# Altium PCB VLC_TX.PcbDoc
Units mil, origin at the board's own origin, x right, y up, seen from the top; angles counter-clockwise.
Board outline 1940 x 3020 mil, 2 copper layers (Top Layer, Bottom Layer); 18 components, 54 nets, 150 pads, 0 vias.
Unrouted connection lines stored in the file: 90.
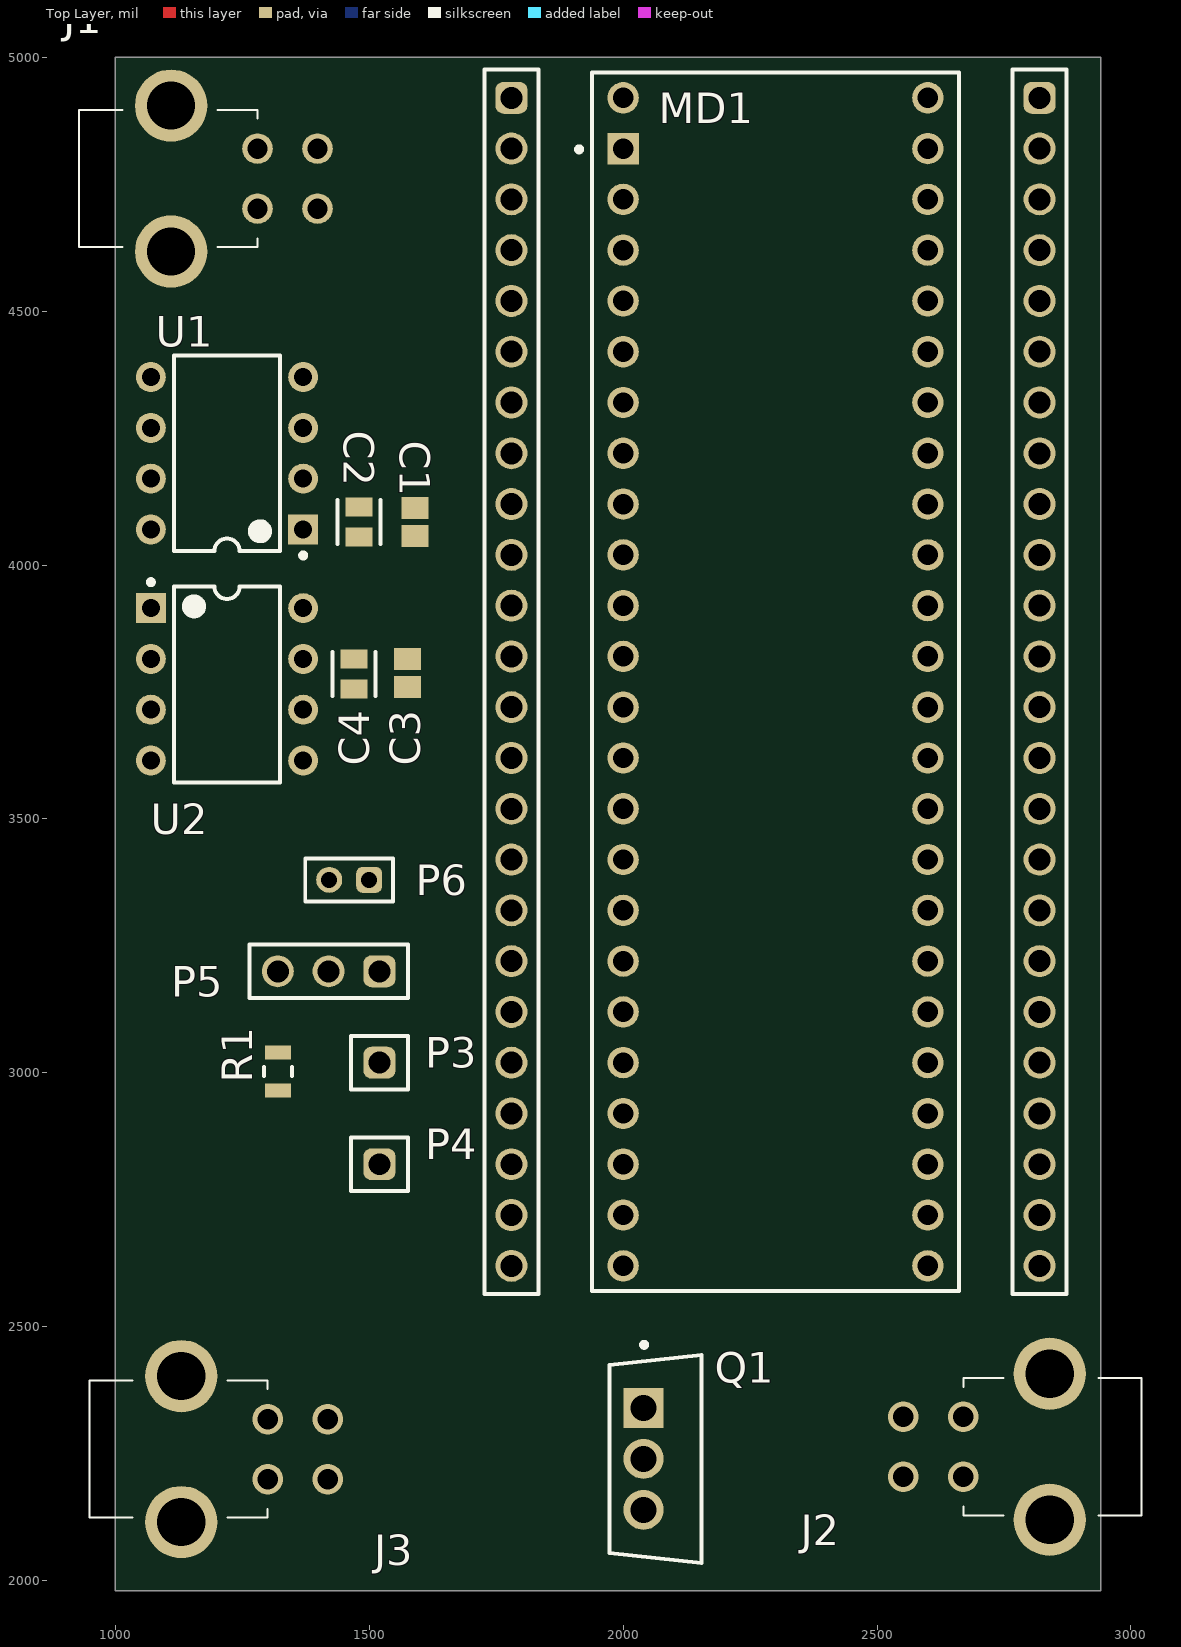
[diagram p0: Top Layer view]
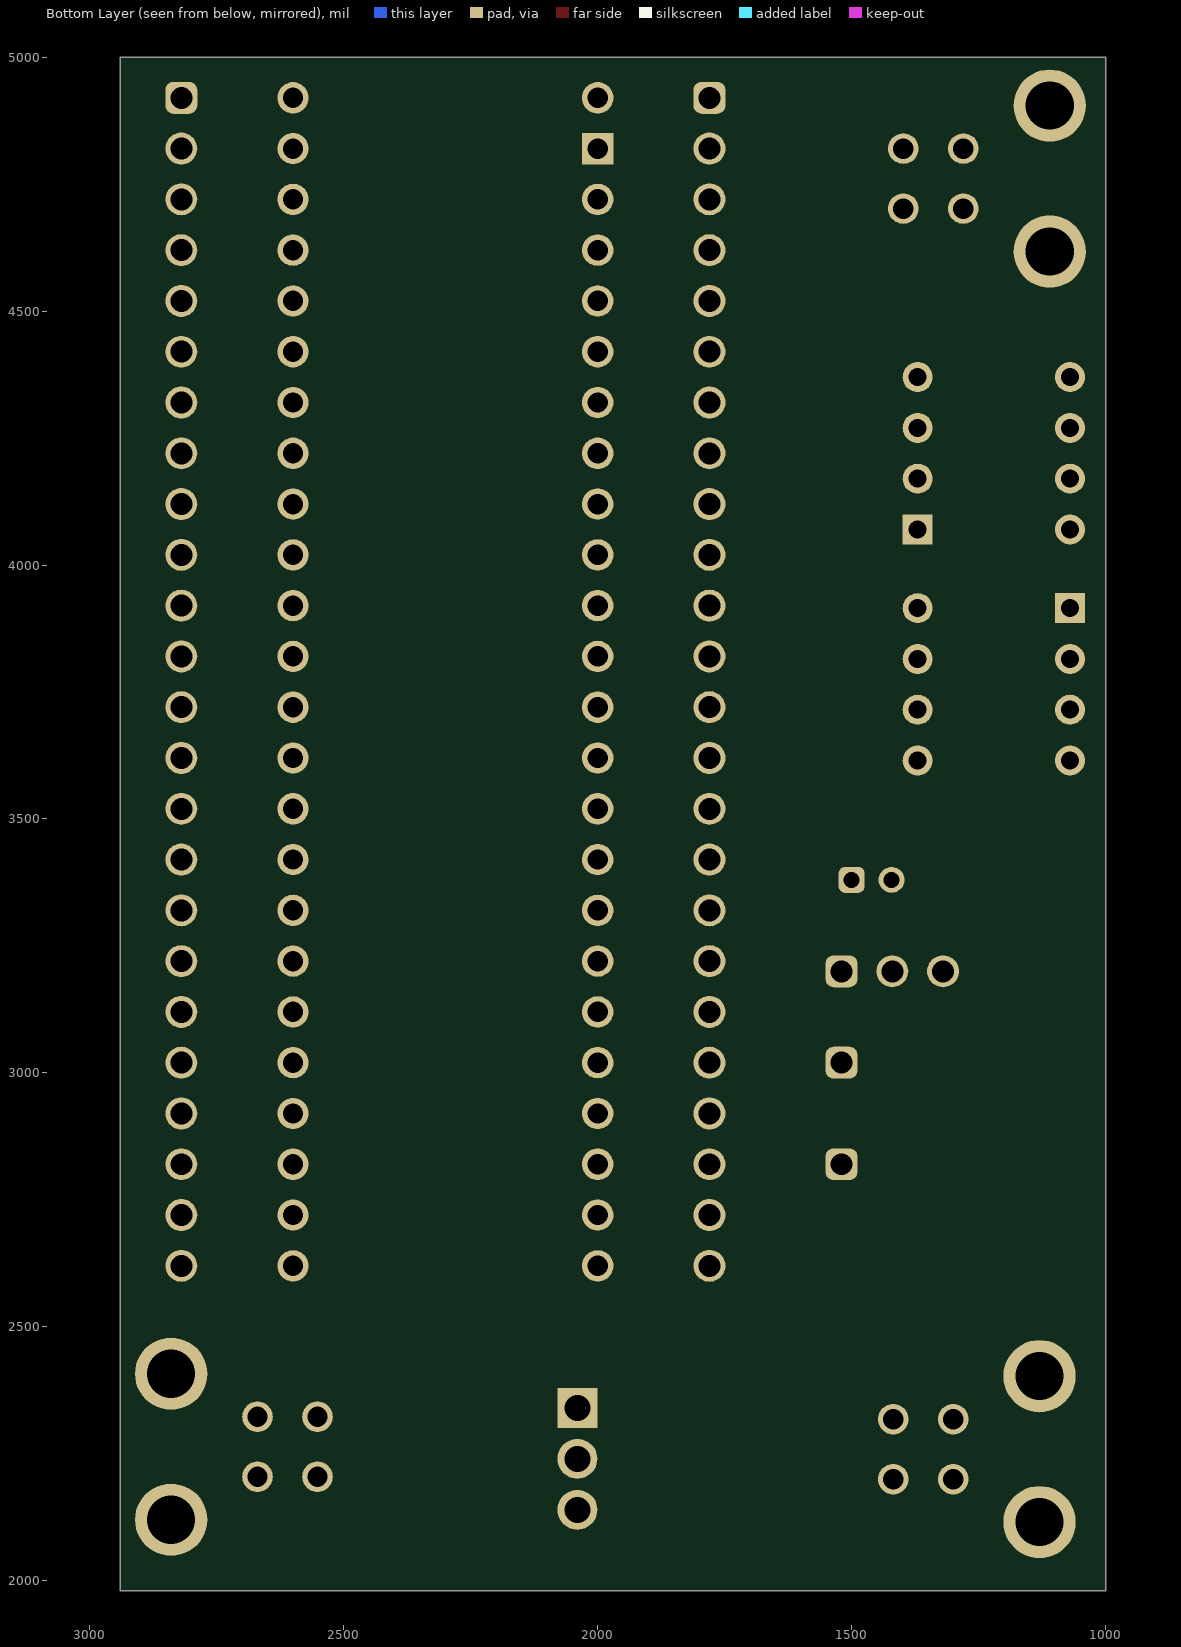
[diagram p1: Bottom Layer view, seen from below]

## Layer stack, top to bottom
Top Solder: solder mask 0.4, Solder Resist, Dk 3.5
Top Layer: signal copper 1.4
Dielectric 1: dielectric 12.6, FR-4, Dk 4.8
Bottom Layer: signal copper 1.4
Bottom Solder: solder mask 0.4, Solder Resist, Dk 3.5

## Board outline
1000,1980 2940,1980 2940,5000 1000,5000

## Design rules (kind name [scope] priority, off if disabled: settings)
Clearance [All] p1: gap=10 ignorepadtopadclearanceinfootprint=FALSE
PolygonConnect [All] p1: connectstyle=Relief reliefconductorwidth=10 reliefentries=4 polygonreliefangle="90 Angle" airgapwidth=10
RoutingVias [All] p1: holewidth=28 width=50 viastyle="Through Hole" minholewidth=28 minwidth=50 maxholewidth=28 maxwidth=50
SolderMaskExpansion [All] p1: expansion=4 istentingtop=FALSE
Width [All] p1: maxlimit=10 minlimit=10 preferedwidth=10
30 further rules are at their usual default settings.

## Classes and differential pairs
component class VLC_TX: J1 J2 J3
component class U_Transconductance: C1 C2 C3 C4 P3 P4 P5 P6 Q1 R1 U1 U2
component class U_Teensy: MD1

## Components (designator, comment, footprint, x,y, rotation, side; value= is the part's Value field where it differs from the comment)
C1 "1uF" CAPC2013X145X50LL20T25 1590,4085 r270 top
C2 "100nF" FP-C0805C-DN-MFG 1480,4085 r90 top value="0.10 μF"
C3 "1uF" CAPC2013X145X50LL20T25 1575,3787.56 r90 top
C4 "100nF" FP-C0805C-DN-MFG 1470,3785 r270 top value="0.10 μF"
J1 "3-794677-4" 37946774 1280,4820 r270 top
J2 "3-794677-4" 37946774 2669.92,2204.65 r90 top
J3 "3-794677-4" 37946774 1300,2318.11 r270 top
MD1 "teensy 4.1" FP-DEV-16996-MFG 2300,3770 r270 top
P1 "61302411121" 61302411121 1780,3770 r270 top
P2 "61302411121" 61302411121 2820,3770 r270 top
P3 "61300111121" 61300111121 1520,3020 r0 top
P4 "61300111121" 61300111121 1520,2820 r0 top
P5 "61300311121" 61300311121 1420,3200 r180 top
P6 "62000211121" 62000211121 1460.63,3380 r180 top
Q1 "TIP31C" FP-TO-220-P0A0015988-MFG 2063.92,2240 r0 top
R1 "100" FP-TNPW0805-e3-MFG 1320,3002.6 r270 top
U1 "MCP4811-E/P" PDIP300-P8 1220,4220 r180 top
U2 "MCP6021-E/P" PDIP300-P8 1220,3765 r0 top

## Footprints (in the part's own frame and the unit in brackets; to place one, negate y for a bottom-side part, rotate by r counter-clockwise, add the part's x,y. Pads: shape width x height; smd on the part's side, far side on the other; paste and mask are expansions set on the pad)
37946774 [mm]
  round 1.53 hole 1.02: 1(0,0) 2(0,3) 3(3,0) 4(3,3)
  round 3.615 hole 2.41: MH1(-2.15,-4.32) MH2(5.15,-4.32)
  silkscreen extent -1.93,-8.92 4.93,0, body extent -3.5,-8.99 6.5,3.25, height 8.59
61300111121 [mm] "Pin Header, pitch 2.54 mm, THT, Vertical, single row, 1p"
  rrect50% 1.6x1.6 hole 1.1: 1(0,0)
  silkscreen extent -1.42,-1.35 1.42,1.35, body extent -1.27,-1.27 1.27,1.27, height 8.57
61300311121 [mm] "Pin Header, pitch 2.54 mm, THT, Vertical, single row, 3p"
  rrect50% 1.6x1.6 hole 1.1: 1(-2.54,0)
  round 1.6 hole 1.1: 2(0,0) 3(2.54,0)
  silkscreen extent -3.96,-1.35 3.96,1.35, body extent -3.81,-1.27 3.81,1.27, height 8.57
61302411121 [mm] "Pin Header, pitch 2.54 mm, THT, Vertical, single row, 24p"
  rrect50% 1.6x1.6 hole 1.1: 1(-29.21,0)
  round 1.6 hole 1.1: 2(-26.67,0) 3(-24.13,0) 4(-21.59,0) 5(-19.05,0) 6(-16.51,0) 7(-13.97,0) 8(-11.43,0) 9(-8.89,0) 10(-6.35,0) 11(-3.81,0) 12(-1.27,0) 13(1.27,0) 14(3.81,0) 15(6.35,0) 16(8.89,0) 17(11.43,0) 18(13.97,0) 19(16.51,0) 20(19.05,0) 21(21.59,0) 22(24.13,0) 23(26.67,0) 24(29.21,0)
  silkscreen extent -30.63,-1.35 30.63,1.35, body extent -30.48,-1.27 30.48,1.27, height 8.57
62000211121 [mm] "Pin Header, pitch 2.00 mm, THT, Vertical, single row, 2p"
  rrect50% 1.3x1.3 hole 0.8: 1(-1,0)
  round 1.3 hole 0.8: 2(1,0)
  silkscreen extent -2.2,-1.07 2.2,1.07, body extent -2,-1 2,1, height 6.05
CAPC2013X145X50LL20T25 [mm] "Chip Capacitor, 2-Leads, Body 2.00x1.25mm, IPC High Density"
  rect 1.1x1.35 smd: 1(-0.7,0) 2(0.7,0)
  body extent -1.1,-0.72 1.1,0.72, height 1.45
FP-C0805C-DN-MFG [mm]
  rect 0.95x1.35 smd paste+0 mask+0: 1(-0.75,0) 2(0.75,0)
  silkscreen extent -1.1,-1.07 1.1,1.07, body extent -1.4,-0.85 1.4,0.85, height 0.25
FP-DEV-16996-MFG [mm]
  rect 1.57x1.57 hole 1.02 paste-2539.97 mask+0: 0(-26.67,-7.62)
  round 1.57 hole 1.02 paste-2539.97 mask+0: 1(-24.13,-7.62) 2(-21.59,-7.62) 3(-19.05,-7.62) 4(-16.51,-7.62) 5(-13.97,-7.62) 6(-11.43,-7.62) 7(-8.89,-7.62) 8(-6.35,-7.62) 9(-3.81,-7.62) 10(-1.27,-7.62) 11(1.27,-7.62) 12(3.81,-7.62) 13(3.81,7.62) 14(1.27,7.62) 15(-1.27,7.62) 16(-3.81,7.62) 17(-6.35,7.62) 18(-8.89,7.62) 19(-11.43,7.62) 20(-13.97,7.62) 21(-16.51,7.62) 22(-19.05,7.62) 23(-21.59,7.62) 24(8.89,-7.62) 25(11.43,-7.62) 26(13.97,-7.62) 27(16.51,-7.62) 28(19.05,-7.62) 29(21.59,-7.62) 30(24.13,-7.62) 31(26.67,-7.62) 32(29.21,-7.62) 33(29.21,7.62) 34(26.67,7.62) 35(24.13,7.62) 36(21.59,7.62) 37(19.05,7.62) 38(16.51,7.62) 39(13.97,7.62) 40(11.43,7.62) 41(8.89,7.62) 42(-29.21,7.62) 43(-26.67,7.62) 44(-24.13,7.62) 45(6.35,7.62) 46(-29.21,-7.62) 47(6.35,-7.62)
  silkscreen extent -30.48,-9.94 30.48,9.19, body extent -30.58,-9.29 30.58,9.29, height 0.25
FP-TNPW0805-e3-MFG [mm]
  rect 0.7x1.3 smd paste+0 mask+0: 1(-0.95,0) 2(0.95,0)
  silkscreen extent -0.23,-0.7 0.23,0.7, body extent -1.4,-0.8 1.4,0.8, height 0.25
FP-TO-220-P0A0015988-MFG [mm]
  rect 2x2 hole 1.3 paste-2539.97 mask+0: 1(-0.607,2.55)
  round 2 hole 1.3 paste-2539.97 mask+0: 2(-0.607,0) 3(-0.607,-2.55)
  silkscreen extent -2.3,-5.2 2.3,5.82, body extent -2.4,-5.3 2.4,5.3, height 0.25
PDIP300-P8 [mm] "8-Pin Plastic Dual In-Line Package (PDIP)"
  rect 1.5x1.5 hole 0.9: 1(-3.81,3.81)
  round 1.5 hole 0.9: 2(-3.81,1.27) 3(-3.81,-1.27) 4(-3.81,-3.81) 5(3.81,-3.81) 6(3.81,-1.27) 7(3.81,1.27) 8(3.81,3.81)
  silkscreen extent -3.94,-4.9 2.65,5.23, body extent -3.55,-4.9 3.55,4.9, height 4.32

## Part data
C1 C3: library part CMP-1036-04746-2, Manufacturer=Kemet, Part Number=C0805C105K4PACTU
C2 C4: library part CMP-2007-00274-2, "CAP CER 0.1UF 16V X7R 0805", Capacitance="0.10 μF", Manufacturer=KEMET, Manufacturer Part Number=C0805C104K4RACTU, Package=C0805C-DN, Temperature="-55°C to +125°C", Temperature Characteristic=X7R, Temperature Coefficient=30ppm/°C, Temperature Range High=+125°C, Temperature Range Low=-55°C, Tolerance=0.1, Voltage Rating="16 V", Automotive=No, Category=Cap, ComponentLink2Description=Datasheet, ComponentLink2URL=https://content.kemet.com/datasheets/KEM_C1003_C0G_SMD.pdf, Device Class L1="Passive Components", Device Class L2=Capacitors, Device Class L3="Ceramic Capacitors", Digikey Description="CAP CER 0.1UF 16V X7R 0805", Height=0.88mm, Ipc Land Pattern Name=CAPC200125X78, Lead Free=Yes, Material=Ceramic, Mouser Description="Multilayer Ceramic Capacitors MLCC - SMD/SMT 16volts 0.1uF X7R 10%", Octopart=https://octopart.com/c0805c104k4ractu-kemet-92155, RoHS=TRUE
J1 J2 J3: "Connector", Manufacturer_Name="TE Connectivity", Mouser Part Number=571-3-794677-4, Arrow Part Number=3-794677-4, Arrow Price/Stock=https://www.arrow.com/en/products/3-794677-4/te-connectivity?region=europe, Datasheet Link=https://www.te.com/commerce/DocumentDelivery/DDEController?Action=srchrtrv&DocNm=micro-mate-n-lok-connector-qrg&DocType=Data%20Sheet&DocLang=English&PartCntxt=3-794677-4&DocFormat=pdf, Height=8.67mm, Manufacturer_Part_Number=3-794677-4, Mouser Price/Stock=https://www.mouser.co.uk/ProductDetail/TE-Connectivity-AMP/3-794677-4?qs=6xDM53S3Z3IXPJK6%252BrOgPw%3D%3D
MD1: library part CMP-157412-000001-1, "TEENSY 4.1 (HEADERS)"
P1 P2: library part CMP-1502-01109-2, Color=Black, Contact Resistance=20mΩ, Current Rating=3A, Operating Supply Voltage=250V, Connector Type="Male Pin", Contact Material=Copper, Contact Mating Length=5.9944mm, Contact Plating=Gold, Gender=Male, Lead Pitch=2.54mm, Mount="Through Hole", NexarPartId=32855561, Number of Contacts=24, Number of Pins=24, Number of Positions=24, Number of Rows=1, Orientation=Vertical, Packaging=Bulk, Pitch=2.54mm, REACH SVHC=Unknown, RoHS=Compliant, Termination=Solder
P3 P4: library part CMP-1502-01058-2, Color=Black, Contact Resistance=20mΩ, Current Rating=3A, Operating Supply Voltage=250V, Connector Type="Male Pin", Contact Material=Copper, Contact Mating Length=5.9944mm, Contact Plating=Gold, Gender=Male, Lead Pitch=2.54mm, Mount="Through Hole", NexarPartId=32855518, Number of Contacts=1, Number of Pins=1, Number of Positions=1, Number of Rows=1, Orientation=Vertical, Packaging=Bulk, REACH SVHC=Unknown, RoHS=Compliant, Termination=Solder
P5: library part CMP-1502-01062-2, Color=Black, Contact Resistance=20mΩ, Current Rating=3A, Max Operating Temperature=105°C, Min Operating Temperature=-40°C, Operating Supply Voltage=250V, Connector Type="Male Pin", Contact Material=Copper, Contact Mating Length=5.9944mm, Contact Plating=Gold, Gender=Male, Height=8.94mm, Lead Free="Lead Free", Lead Pitch=2.54mm, Mount="Through Hole", NexarPartId=32855521, Number of Contacts=3, Number of Pins=3, Number of Positions=3, Number of Rows=1, Orientation=Vertical, Packaging=Bulk, Pitch=2.54mm, REACH SVHC=Unknown, RoHS=Compliant, Termination=Solder, Voltage Rating=250V
P6: library part CMP-1502-00956-3, Contact Resistance=20mΩ, Current Rating=2A, Max Operating Temperature=105°C, Min Operating Temperature=-40°C, Operating Supply Voltage=200V, Contact Material=Gold, Gender=Male, Height=6.35mm, Lead Pitch=2mm, NexarPartId=61924778, Number of Contacts=2, Number of Pins=2, Number of Rows=1, Orientation=Vertical, RoHS=Non-Compliant, Voltage Rating=200V
Q1: library part CMP-12195-000001-1, "TRANS NPN 100V 3A TO-220", Collector Base Voltage=100V, Collector Emitter Saturation Voltage=1.2V, Emitter Base Voltage=5V, Manufacturer=STMicroelectronics, Max Collector Current=3A, Max Junction Temp=+150°C, Package=TO-220-P0A0015988, Power Dissipation=2W, Temperature="to +150°C", Automotive=No, Category=Trans, Collector Emitter Voltage=100V, ComponentLink2Description=Datasheet, ComponentLink2URL=https://www.st.com/resource/en/datasheet/tip31c.pdf, Device Class L1="Discrete Semiconductors", Device Class L2=Transistors, Device Class L3=BJTs, Digikey Description="TRANS NPN 100V 3A TO-220", Height=19.68mm, Hfe Max=50, Hfe Min=10, Hfe Testic=3A, Hfe Testvce=4V, Lead Free=Yes, Manufacturer Part Number=TIP31C, Mouser Description="Bipolar Transistors - BJT NPN Gen Pur Power", Number Of Elements=1, Number Of Npn=1, Octopart=https://octopart.com/tip31c-stmicroelectronics-15555, RoHS=TRUE, Standoff Height=3.5mm, Temperature Range High=+150°C
R1: library part CMP-2001-04723-2, Case Code (Imperial)=0805, Case Code (Metric)=2012, Max Operating Temperature=125°C, Min Operating Temperature=-55°C, Power Rating=125mW, Resistance=100Ω, Temperature Coefficient=25ppm/°C, Tolerance=1%, Voltage Rating=150V, Voltage Rating (DC)=100V, Case/Package=0805, Composition="Thin Film", Contact Plating=Tin, Depth=1.25mm, Height=450µm, Lead Free="Lead Free", Length=2mm, Military Standard=Not, NexarPartId=42014021, Number of Pins=2, Number of Terminations=2, Packaging="Cut Tape", Radiation Hardening=No, REACH SVHC="No SVHC", RoHS=Compliant, Schedule B="8533210045, 8533210045", Termination=SMD/SMT, Weight=5.499807mg, Width=1.2mm, Working Voltage=150V
U1: library part CMP-0188-01069-1, "10-Bit DACs with Internal VREF and SPI Interface, 8-Pin PDIP, Extended Temperature", Code_JEDEC=MS-001, ComponentLink1Description="Manufacturer URL", ComponentLink1URL=http://www.microchip.com/, ComponentLink2Description=Datasheet, ComponentLink2URL=http://ww1.microchip.com/downloads/en/DeviceDoc/22244B.pdf, ComponentLink3Description="Package Specification", ComponentLink3URL=http://www.microchip.com/stellent/groups/techpub_sg/documents/packagingspec/en012702.pdf, DatasheetVersion="revB, Apr-2010", PackageDescription="8-Lead Plastic Dual In-Line (P) - 300 mil Body [PDIP]", PackageReference=PDIP300-P8, PackageVersion="revBB, Aug-2009"
U2: library part CMP-0187-00675-2, "None", Case/Package=PDIP, Input Bias Current=1pA, Input Offset Voltage (Vos)=250uV, Max Operating Temperature=125°C, Max Supply Voltage=5.5V, Min Operating Temperature=-40°C, Min Supply Voltage=2.5V, Nominal Supply Current=1mA, Output Current=22mA, Output Current per Channel=30mA, Package Quantity=60, Power Supply Rejection Ratio (PSRR)=74dB, Voltage Gain=110dB, Amplifier Type="GENERAL PURPOSE", Bandwidth=10MHz, Common Mode Rejection Ratio=70dB, Gain Bandwidth Product=10MHz, Harmonic Distortion=0.00053%, Height=0.195inch, Lead Free="Lead Free", Length=0.4inch, Mount="Through Hole", Number of Amplifiers=1, Number of Channels=1, Number of Circuits=1, Number Of Elements=1, Number of Pins=8, Operating Supply Current=1mA, Packaging=Rail/Tube, Radiation Hardening=No, REACH SVHC="No SVHC", RoHS Compliant=Yes, Slew Rate=7V/µs, Supply Current=1mA, Technology=CMOS, Unity Gain Bandwidth Product=10MHz, Width=0.28inch

## Nets (pads, with @x,y where several pads share a name; then routed paths per layer and width w, separated by ;. In a path a pad name is that pad's centre, name@x,y a point inside that pad or via, vN(x,y) a via of type N, cw(c..) or ccw(c..) an arc to the next point about the centre after c; other vN are vias at no path point)
0: MD1.0 P1.2
1: MD1.1 P1.3
2: MD1.2 P1.4
3: MD1.3 P1.5
3V3L: MD1.44 P2.3
3V3R: MD1.47 P1.15
4: MD1.4 P1.6
5: MD1.5 P1.7
5V: C1.2 C2.1 C3.2 C4.1 J1.2 J1.4 MD1.42 P2.1 U1.1 U2.7
6: MD1.6 P1.8
7: MD1.7 P1.9
8: MD1.8 P1.10
9: MD1.9 P1.11
10: MD1.10 P1.12 U1.2
11: MD1.11 P1.13
12: MD1.12 P1.14
13: MD1.13 P2.14 U1.3 U1.4
14: MD1.14 P2.13
15: MD1.15 P2.12
16: MD1.16 P2.11
17: MD1.17 P2.10
18: MD1.18 P2.9
19: MD1.19 P2.8
20: MD1.20 P2.7
21: MD1.21 P2.6
22: MD1.22 P2.5
23: MD1.23 P2.4
24: MD1.24 P1.16
25: MD1.25 P1.17
26: MD1.26 P1.18
27: MD1.27 P1.19
28: MD1.28 P1.20
29: MD1.29 P1.21
30: MD1.30 P1.22
30V: J2.2 J2.4
31: MD1.31 P1.23
32: MD1.32 P1.24
33: MD1.33 P2.24
34: MD1.34 P2.23
35: MD1.35 P2.22
36: MD1.36 P2.21
37: MD1.37 P2.20
38: MD1.38 P2.19
39: MD1.39 P2.18
40: MD1.40 P2.17
41: MD1.41 P2.16
GND: C1.1 C2.2 C3.1 C4.2 J1.1 J1.3 J1.MH1 J1.MH2 J2.1 J2.3 J2.MH1 J2.MH2 MD1.43 MD1.45 MD1.46 P1.1 P2.2 P2.15 P6.1 Q1.3 U1.5 U1.7 U2.4
LED+: J3.2 J3.4
LED-: J3.1 J3.3 Q1.2
NetP3_1: P3.1 P5.1
NetP4_1: P4.1 Q1.1 R1.2
NetP5_3: P5.3 R1.1
NetU1_8: U1.8 U2.3
TP1: P5.2 P6.2 U2.2 U2.6
pads on no net: J3.MH1 J3.MH2 U1.6 U2.1 U2.5 U2.8